# Altium PCB PCB1.PcbDoc
Units mm, origin at the board's own origin, x right, y up, seen from the top; angles counter-clockwise.
Board outline 80.01 x 80.64 mm, 2 copper layers (Top Layer, Bottom Layer); 24 components, 19 nets, 101 pads, 4 vias.
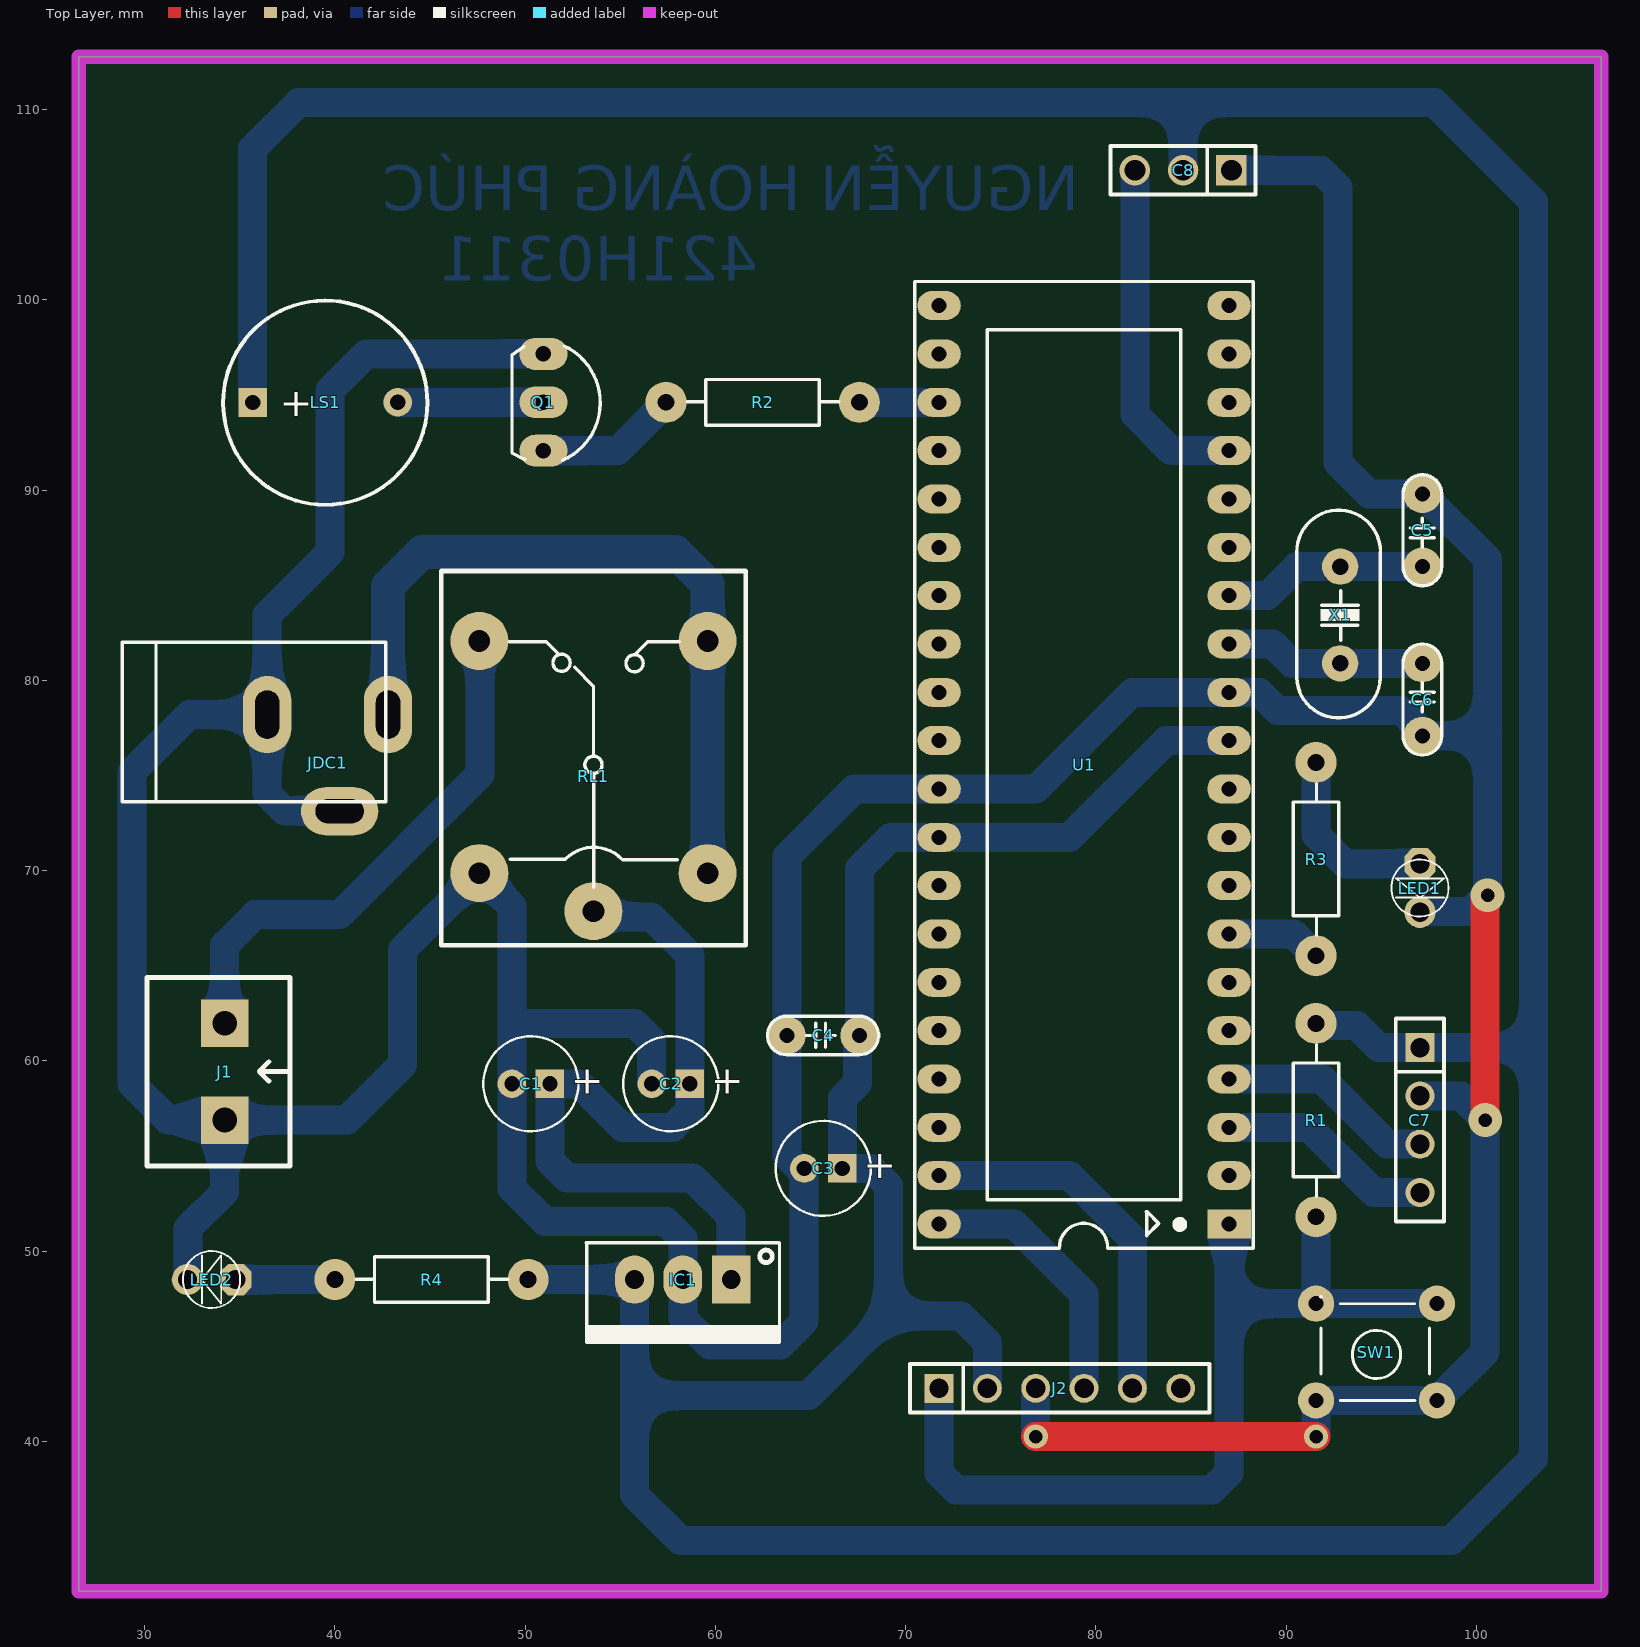
[diagram p0: Top Layer view]
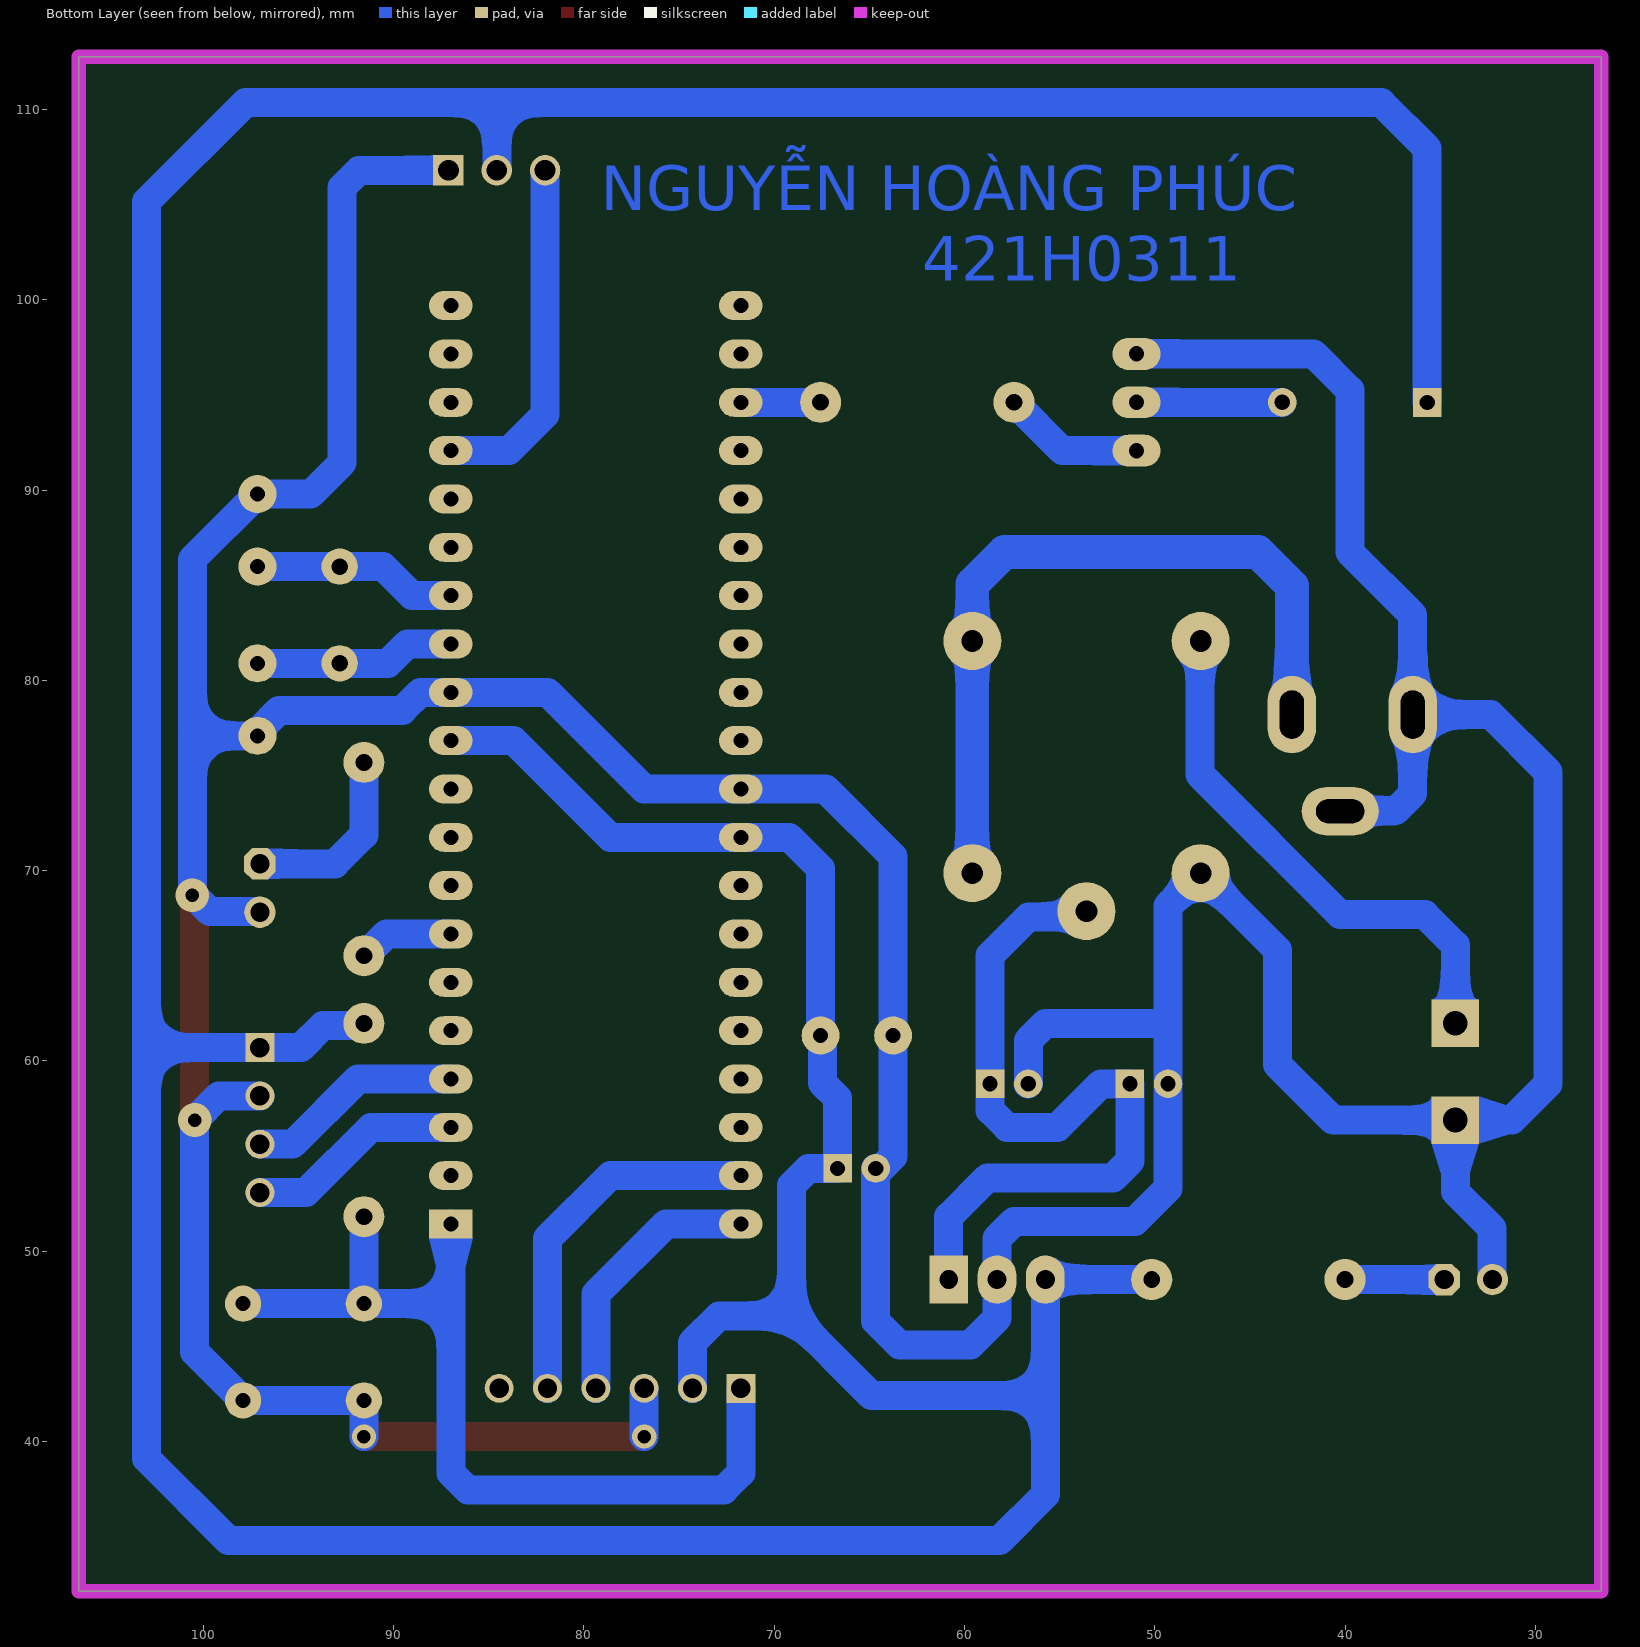
[diagram p1: Bottom Layer view, seen from below]
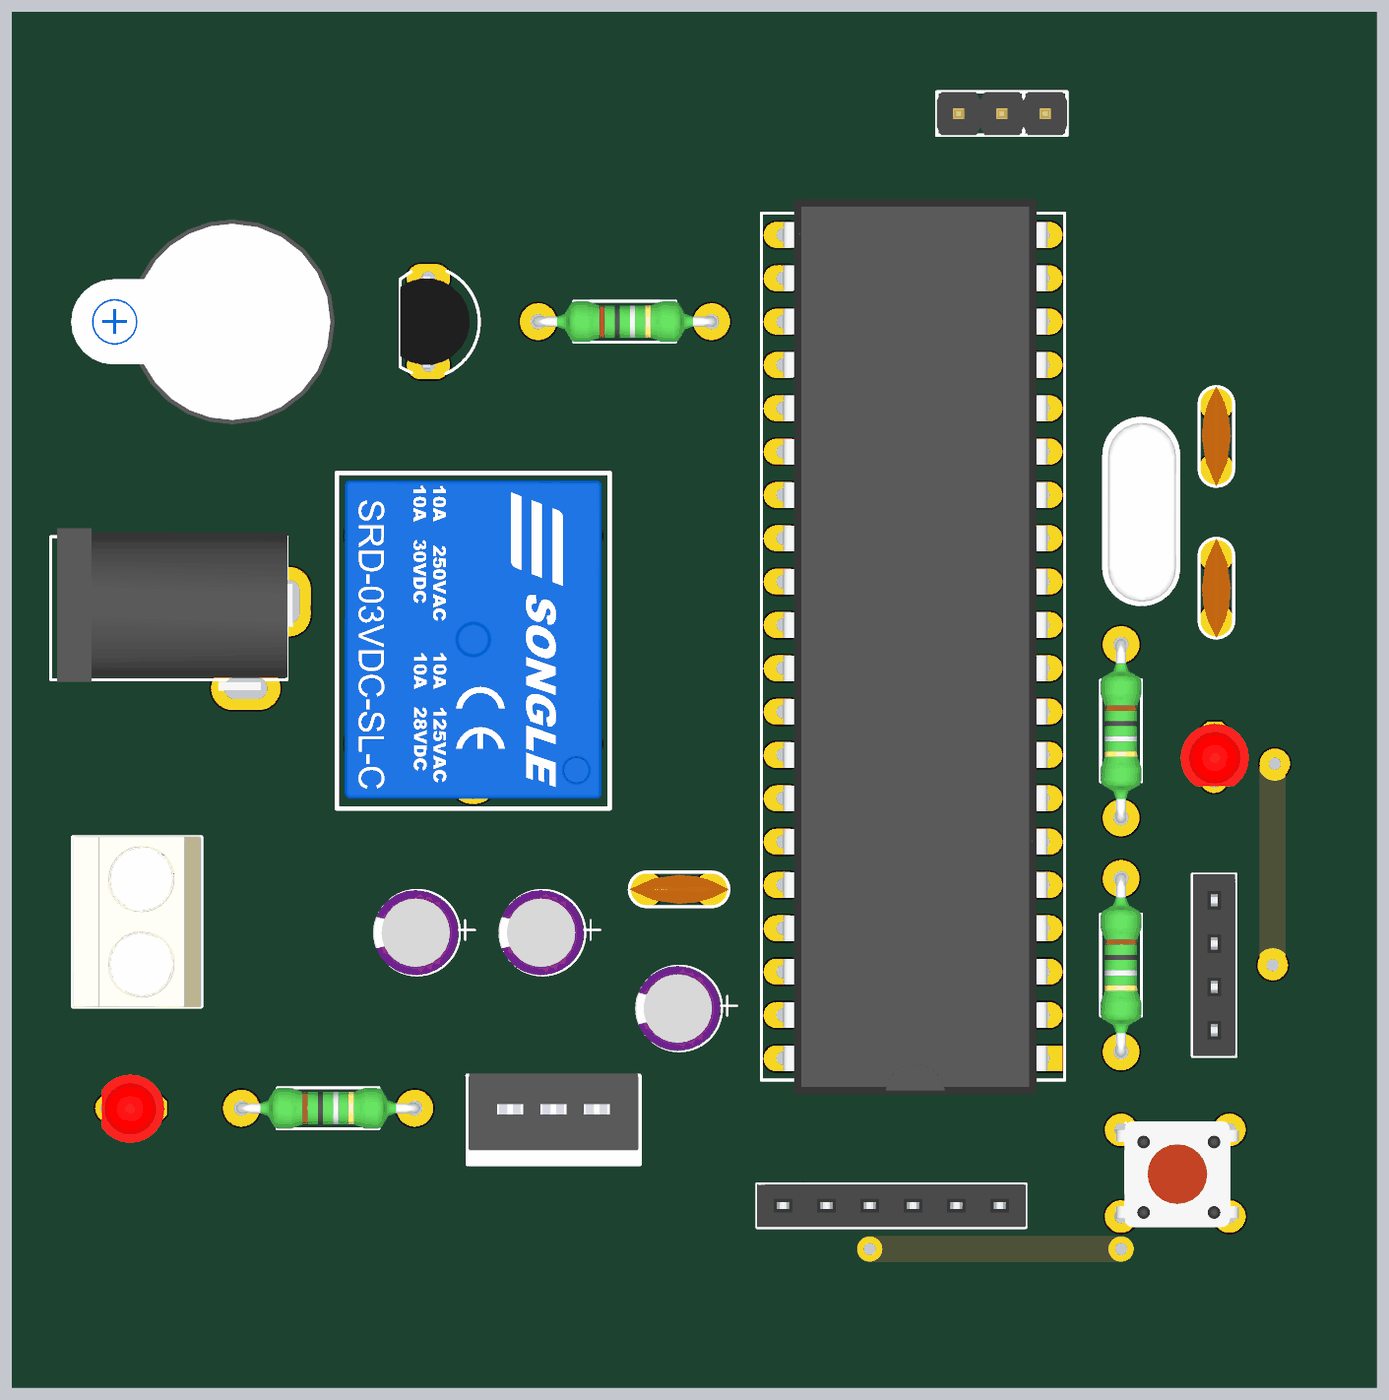
[diagram p2: 3D render of the assembled board from above, using the file's embedded part models]

## Layer stack, top to bottom
Top Solder: solder mask 0.0102, Solder Resist, Dk 3.5
Top Layer: signal copper 0.0356
Dielectric 1: dielectric 0.32, FR-4, Dk 4.8
Bottom Layer: signal copper 0.0356
Bottom Solder: solder mask 0.0102, Solder Resist, Dk 3.5

## Board outline
26.543,32.131 26.543,112.776 106.553,112.776 106.553,32.131

## Design rules (kind name [scope] priority, off if disabled: settings)
Clearance [All] p1: gap=0.762 ignorepadtopadclearanceinfootprint=FALSE
PolygonConnect [All] p1: connectstyle=Relief reliefconductorwidth=0.254 reliefentries=4 polygonreliefangle="90 Angle" airgapwidth=0.254
RoutingVias [All] p1: holewidth=0.711 width=1.27 viastyle="Through Hole" minholewidth=0.711 minwidth=1.27 maxholewidth=0.711 maxwidth=1.27
SolderMaskExpansion [All] p1: expansion=0.102 istentingtop=FALSE
SupplyNets "Schematic Supply Nets_1" [InNet('+5')] p1: voltage=0.000
SupplyNets "Schematic Supply Nets" [InNet('GND')] p2: voltage=0.000
Width [All] p1: maxlimit=1.778 minlimit=0.254 preferedwidth=1.016
30 further rules are at their usual default settings.

## Components (designator, comment, footprint, x,y, rotation, side; value= is the part's Value field where it differs from the comment)
C1 "100uF" CA-ALU-5 50.308,58.801 r180 top value=104
C2 "10uF" CA-ALU-5 57.658,58.801 r180 top value=104
C3 "10uF" CA-ALU-5 65.671,54.356 r180 top value=104
C4 "0.1uF" CN1.5 65.532,61.341 r0 top value=33pF
C5 "20pF" CN1.5 97.155,87.757 r90 top value=33pF
C6 "20pF" CN1.5 97.155,79.121 r270 top value=33pF
C7 "Flame sensor" JP4-C1T 97.028,60.706 r270 top
C8 "Servo" JP3-D1T 87.122,106.807 r180 top
IC1 "LM7805" TO220-123 60.833,48.514 r180 top
J1 "BAT" KF2-5.08 34.214,59.436 r270 top
J2 "PICKIT" JP6-C1T 71.755,42.799 r0 top
JDC1 "Jac DC" DC0 39.624,75.663 r0 top
LED1 "LED" LED-3MM-RED 97.028,70.358 r270 top value="LED 3 ly Single Colour"
LED2 "LED" LED-3MM-RED 34.798,48.514 r180 top value="LED 3 ly Single Colour"
LS1 "Speaker" SPEAKER 35.687,94.602 r0 top
Q1 "C1815" TO92-123 50.965,94.615 r270 top
R1 "10k" RES-1/4W 91.694,57.277 r90 top
R2 "1k" RES-1/4W 62.103,94.742 r180 top
R3 "1k" RES-1/4W 91.694,70.993 r90 top
R4 "Res" RES-1/4W 44.704,48.641 r180 top
RL1 "Relay 10A/12V" "Relay - SRD-03VDC-SL-C" 53.594,75.565 r270 top value="Relay SPDT, 10A, 12V"
SW1 "SW" SW2-DIP 97.917,42.164 r180 top value="SW chip 2 pin"
U1 "PIC16F887A" DIP40/W0.6 86.995,51.435 r90 top
X1 "20MHz" XT2 92.837,83.439 r90 top value=4Mhz

## Footprints (in the part's own frame and the unit in brackets; to place one, negate y for a bottom-side part, rotate by r counter-clockwise, add the part's x,y. Pads: shape width x height; smd on the part's side, far side on the other; paste and mask are expansions set on the pad)
CA-ALU-5 [mm] "Polarized capacitors, Aluminum Electrolytic Capacitors, 2-Leads, Body 5x11x2x0.5"
  rect 1.5x1.5 hole 0.8: 1(-1,0)
  round 1.5 hole 0.8: 2(1,0)
  silkscreen extent -2.5,-2.5 2.5,2.5, body extent -2.41,-2.5 2.59,2.5, height 11
CN1.5 [mm]
  round 2 hole 0.787: 1(-1.778,0) 2(2.032,0)
  silkscreen extent -2.79,-1.02 3.04,1.02, body extent -2.79,-0.85 3.05,0.85, height 5.97
DC0 [mil] "Jac DC input"
  oval 100x160 hole 50 slot 100 at 90 deg: 1(125,100) 2(-125,100)
  oval 160x100 hole 50 slot 100 at 0 deg: 3(25,-100)
  silkscreen extent -425,-80 120,250, body extent -410,-105 134,269, height 434
DIP40/W0.6 [mil] "40 PIN, W 600mil, Pin to pin 100mil"
  rect 60x90 hole 31: 1(0,0)
  oval 60x90 hole 31: 2(100,0) 3(200,0) 4(300,0) 5(400,0) 6(500,0) 7(600,0) 8(700,0) 9(800,0) 10(900,0) 11(1000,0) 12(1100,0) 13(1200,0) 14(1300,0) 15(1400,0) 16(1500,0) 17(1600,0) 18(1700,0) 19(1800,0) 20(1900,0) 21(1900,600) 22(1800,600) 23(1700,600) 24(1600,600) 25(1500,600) 26(1400,600) 27(1300,600) 28(1200,600) 29(1100,600) 30(1000,600) 31(900,600) 32(800,600) 33(700,600) 34(600,600) 35(500,600) 36(400,600) 37(300,600) 38(200,600) 39(100,600) 40(0,600)
  silkscreen extent -50,-50 1950,650, body extent -82,-10 1982,600, height 224
JP3-D1T [mm] "3 pins, 1 row, straight, gold plating"
  rect 1.6x1.6 hole 1.1: 1(0,0)
  round 1.6 hole 1.1: 2(2.54,0) 3(5.08,0)
  silkscreen extent -1.27,-1.27 6.35,1.27, body extent -1.27,-1.27 6.35,1.27, height 8.54
JP4-C1T [mm] "4 row, straight, gold plating"
  rect 1.52x1.52 hole 1.02: 1(0,0)
  round 1.52 hole 1.02: 2(2.54,0) 3(5.08,0) 4(7.62,0)
  silkscreen extent -1.52,-1.27 9.14,1.27, body extent -1.52,-1.25 9.14,1.25, height 8.51
JP6-C1T [mm] "6 row, straight, gold plating"
  rect 1.52x1.52 hole 1.02: 1(0,0)
  round 1.52 hole 1.02: 2(2.54,0) 3(5.08,0) 4(7.62,0) 5(10.16,0) 6(12.7,0)
  silkscreen extent -1.52,-1.27 14.22,1.27, body extent -1.52,-1.25 14.22,1.25, height 8.51
KF2-5.08 [mm]
  rect 2.5x2.5 hole 1.3: 1(-2.54,0) 2(2.54,0)
  silkscreen extent -4.95,-4.08 4.95,3.43, body extent -5,-4.07 5,3.43, height 10
LED-3MM-RED [mil]
  oct 65x65 hole 40: 1(0,0)
  round 65 hole 40: 2(100,0)
  silkscreen extent -9,-59 109,59, body extent -27,-77 117,80, height 181
"Relay - SRD-03VDC-SL-C" [mil] "19.1 x 15.5 x 15.3mm"
  round 120 hole 45: 1(302.94,0) 2(-256.12,-236.22) 3(-256.12,236.22) 4(224.2,236.22) 5(224.2,-236.22)
  silkscreen extent -401,-315 373,315, body extent -385,-297 351,297, height 588
RES-1/4W [mil]
  round 85 hole 35: 1(-215,5) 2(185,5)
  silkscreen extent -173,-42 141,52, body extent -227,-42 197,52, height 95
SPEAKER [mm]
  rect 1.5x1.5 hole 0.8: 1(0,0)
  round 1.5 hole 0.8: 2(7.62,0.013)
  silkscreen extent -1.55,-5.38 9.18,5.36, body extent -5.67,-6 9.77,6, height 3.5
SW2-DIP [mil] "SW button 4pin, 250 x250 mil"
  round 75 hole 31: 1(0,0) 2(0,-200) 3(250,-200) 4(250,0)
  silkscreen extent 15,-215 240,0, body extent -36,-220 276,24, height 276
TO92-123 [mil] "TO-92"
  oval 66x100 hole 32: 1(-100,0) 2(0,0) 3(100,0)
  silkscreen extent -117,-65 120,118, body extent -109,-66 109,95, height 245
TO220-123 [mil] "TO-220 - 1-2-3"
  rect 80x100 hole 39: 1(0,0)
  oval 80x100 hole 39: 2(100,0) 3(200,0)
  silkscreen extent -100,-76 300,130, body extent -95,-80 295,97, height 323
XT2 [mil] "Footpin for Crystal 2 pin"
  round 75 hole 34: 1(-100,0) 2(100,0)
  silkscreen extent -213,-83 217,90, body extent -216,-87 216,90, height 144

## Part data
C1 C2 C3: library part CN-ALU-DIP, "Capacitor (Semiconductor SIM Model)", LatestRevisionDate=17-Jul-2002, LatestRevisionNote="Re-released for DXP Platform.", PackageReference=C1206, Publisher="Altium Limited"
C4 C5 C6: library part CN
C7: library part JP4, "WR-PHD 2.54 mm Angled Socket Header", Manufacturer="W¨¹rth Elektronik eiSos GmbH", partNo=613004143121, ComponentLink1 Description=Manufacturer, ComponentLink1URL=http://www.we-online.com, ComponentLink2 Description=Datasheet, ComponentLink2URL=http://katalog.we-online.de/em/datasheet/6130xx143121.pdf, Created by="Karrer Zheng", Created Date="29 March 2013", NoPins=04
C8: library part JP3, "WR-PHD 2.54 mm Angled Socket Header", Manufacturer="W¨¹rth Elektronik eiSos GmbH", partNo=613003143121, ComponentLink1 Description=Manufacturer, ComponentLink1URL=http://www.we-online.com, ComponentLink2 Description=Datasheet, ComponentLink2URL=http://katalog.we-online.de/em/datasheet/6130xx143121.pdf, Created by="Karrer Zheng", Created Date="29 March 2013", NoPins=03
IC1: library part LM78xx, "Positive Voltage Regulator", ComponentLink1Description="Manufacturer Link", ComponentLink1URL=http://www.st.com/, ComponentLink2Description=Datasheet, ComponentLink2URL=http://www.st.com/stonline/products/literature/ds/2146/l78m05c.pdf, DatasheetVersion=Apr-1994, LatestRevisionDate=17-Jul-2002, LatestRevisionNote="Re-released for DXP Platform.", Note="Tab is connected to pin 3 (GND).", PackageDescription="TO, Thru-Hole, Vertical, Heatsink Mounted; 3 In-Line Leads; Pitch 2.54 mm; Pin sequence 1, 3, 2", PackageReference=ISOWATT220AB, PackageVersion=Jul-1998, Published=24-Aug-2001, Publisher="Altium Limited"
J1: library part KF2, Manufacturer="Würth Elektronik eiSos GmbH", partNo=691103110002, ComponentLink1 Description=Manufacturer, ComponentLink1URL=http://www.we-online.com, ComponentLink2 Description=Datasheet, ComponentLink2URL=http://katalog.we-online.de/em/datasheet/6911031100xx.pdf, Created by="Karrer Zheng", Created Date="29 October 2013", NoPins=2
J2: library part JP6, "WR-PHD 2.54 mm Angled Socket Header", Manufacturer="W¨¹rth Elektronik eiSos GmbH", partNo=613006143121, ComponentLink1 Description=Manufacturer, ComponentLink1URL=http://www.we-online.com, ComponentLink2 Description=Datasheet, ComponentLink2URL=http://katalog.we-online.de/em/datasheet/6130xx143121.pdf, Created by="Karrer Zheng", Created Date="29 March 2013", NoPins=06
JDC1: library part DCIN, "Jac DC input"
LED1 LED2: "LED Single colour Green and Red"
LS1: "Loudspeaker", LatestRevisionDate=17-Jul-2002, LatestRevisionNote="Re-released for DXP Platform.", PackageReference=PIN2, Published=24-Mar-1999, Publisher="Altium Limited"
Q1: library part C458, "NPN 600mW, ECB"
R1 R2 R3: library part Res, "Res", Manufacturer="Generic Components", Class=Passive, Published=08/06/2000, Publisher="Altium Hobart Technology Centre", SubClass=R
R4: Manufacturer="Generic Components", Class=Passive, Published=08/06/2000, Publisher="Altium Hobart Technology Centre", SubClass=R
RL1: library part "Relay 5", "Relay SPDT,10A - 12VDC 5 Pin"
SW1: library part SW2, "Switch button 2 pin"
U1: library part PIC16F887-PU, "Flash-Based, 8-Bit CMOS Microcontroller with nanoWatt Technology, 8K (x14-Bit words) Program Memory, 624 Bytes Data Memory, 35 I/O pins, 40-Pin PDIP, Standard VDD Range, Extended Temperature", Supplier Part Number 1=PIC16F887-E/P-ND, ComponentLink1Description=Datasheet, ComponentLink1URL=http://ww1.microchip.com/downloads/en/DeviceDoc/41291F.pdf, ComponentLink2Description="Packaging Specification", ComponentLink2URL=http://www.microchip.com/stellent/groups/techpub_sg/documents/packagingspec/en012702.pdf, ComponentLink3Description="Microchip.com Home", ComponentLink3URL=http://www.microchip.com/, DatasheetVersion="revF, Apr-2009", LatestRevisionDate=02-Dec-2009, LatestRevisionNote="Updated datasheet to version revF, Apr-2009.", PackageDescription="40-Lead Plastic Dual In-Line (P) - 600 mil Body [PDIP]", PackageReference=PDIP600-P40, PackageVersion="revBB, Aug-2009", Published=29-Jan-2009, Publisher="Altium Limited", Supplier 1=Digi-Key, Supplier 2=Farnell, Supplier Part Number 2=1703423
X1: library part XT2, "Crystal, 32.768 KHz, -40 to 85 degC, 3.2 x 1.5 x 0.9 mm SMD"

## Via types
v1: diameter 1.27, hole 0.711, Top Layer to Bottom Layer, 2 vias
v2: diameter 1.778, hole 0.711, Top Layer to Bottom Layer, 2 vias

## Nets (pads, with @x,y where several pads share a name; then routed paths per layer and width w, separated by ;. In a path a pad name is that pad's centre, name@x,y a point inside that pad or via, vN(x,y) a via of type N, cw(c..) or ccw(c..) an arc to the next point about the centre after c; other vN are vias at no path point)
+5: C3.1 C4.2 C7.1 C8.2 IC1.3 J2.2 LS1.1 R1.2 R4.1 U1.11 U1.32 | length 303.5
  Bottom Layer w1.524: LS1.1 35.687,107.95 38.1,110.363 84.582,110.363 ; R4.1 IC1.3 55.753,42.418 ; J2.2 74.295,45.212 72.898,46.609 69.088,46.609 ; C8.2@84.582,106.828 84.582,110.363 ; U1.11 83.693,76.835 78.613,71.755 U1.32 69.215,71.755 67.564,70.104 C4.2 67.473,61.25 67.473,58.845 66.671,58.043 C3.1 68.195,54.356 69.088,53.463 69.088,46.609 ; R1.2 91.689,61.854 93.721,61.854 94.869,60.706 C7.1 102.997,60.706 ; 55.753,42.418 55.753,37.211 58.166,34.798 98.679,34.798 102.997,39.116 102.997,60.706 ; 55.753,42.418 64.897,42.418 69.088,46.609 ; 84.582,110.363 97.79,110.363 102.997,105.156 102.997,60.706
+12: C1.1 C2.1 IC1.1 RL1.1 | length 40.9
  Bottom Layer w1.524: RL1.1 53.886,67.579 56.627,67.579 58.658,65.548 C2.1 58.658,57.408 57.765,56.515 55.118,56.515 52.832,58.801 C1.1 51.308,54.741 52.201,53.848 58.801,53.848 60.833,51.816 IC1.1
+12_ADAP: JDC1.1 RL1.3 RL1.4 | length 40.2
  Bottom Layer w1.778: JDC1.1 42.799,84.963 44.577,86.741 57.912,86.741 59.594,85.059 RL1.4
+12_BAT: J1.1 RL1.2 | length 27.9
  Bottom Layer w1.524: J1.1 34.214,66.091 35.814,67.691 40.259,67.691 47.625,75.057 RL1.2@47.625,81.752
Analog_0: C7.4 U1.3 | length 11.5
  Bottom Layer w1.524: U1.3 91.186,56.515 94.615,53.086 C7.4
Buzzer: R2.1 U1.23 | length 4.2
  Bottom Layer w1.524: R2.1 U1.23
Digital_0: C7.3 U1.4 | length 11.5
  Bottom Layer w1.524: U1.4 91.879,59.055 95.308,55.626 C7.3
GND: C1.2 C2.2 C3.2 C4.1 C5.2 C6.2 C7.2 C8.1 IC1.2 J1.2 J2.3 JDC1.2 JDC1.3 LED1.2 LED2.2 Q1.1 RL1.5 SW1.1 SW1.4 U1.12 U1.31 | length 326.3
  Top Layer w1.524: v1(76.835,40.259) v1(91.567,40.259) ; v2(100.457,56.896) 100.457,68.511 100.584,68.638 v2(100.584,68.707)
  Bottom Layer w1.524: LED2.2@32.258,48.641 32.282,48.665 32.282,51.205 34.214,53.137 J1.2 ; JDC1.3@41.5,73.152 37.342,73.152 36.449,74.045 JDC1.2 ; Q1.1 41.656,97.155 39.751,95.25 39.751,86.741 36.449,83.439 JDC1.2 ; C2.2 56.642,58.817 56.642,61.083 55.749,61.976 49.308,61.976 ; v1(76.835,40.259) J2.3 ; C8.1 91.817,106.807 92.71,105.914 92.71,91.44 94.361,89.789 C5.2 100.584,86.36 100.584,77.089 ; v1(91.567,40.259) SW1.4 SW1.1 100.457,44.704 v2(100.457,56.896) 99.187,58.166 C7.2 ; LED1.2 97.052,67.842 99.651,67.842 100.515,68.707 v2(100.584,68.707) 100.584,77.089 ; J1.2 40.64,56.896 43.561,59.817 43.561,65.837 RL1.5 49.308,68.156 49.308,61.976 ; J1.2 31.242,56.896 29.337,58.801 29.337,75.184 32.356,78.203 JDC1.2 ; 49.308,61.976 C1.2 49.308,53.308 51.054,51.562 57.4,51.562 58.293,50.669 IC1.2 58.293,46.482 59.69,45.085 63.428,45.085 64.671,46.327 C3.2 64.385,54.356 63.754,54.987 C4.1 63.754,70.739 67.31,74.295 U1.31 76.835,74.295 81.915,79.375 U1.12 88.588,79.375 89.541,78.423 96.024,78.423 97.064,77.383 97.064,77.18 C6.2 100.584,77.089
NetLED1_1: LED1.1 R3.2 | length 9.9
  Bottom Layer w1.524: R3.2 91.567,71.882 93.091,70.358 LED1.1
NetLED2_1: LED2.1 R4.2 | length 5.2
  Bottom Layer w1.524: LED2.1 R4.2
NetLS1_2: LS1.2 Q1.2 | length 7.7
  Bottom Layer w1.524: LS1.2 Q1.2
NetQ1_3: Q1.3 R2.2 | length 7.5
  Bottom Layer w1.524: Q1.3 54.864,92.075 R2.2
PGC: J2.5 U1.39 | length 19.4
  Bottom Layer w1.524: U1.39 78.613,53.975 81.915,50.673 J2.5
PGD: J2.4 U1.40 | length 14.1
  Bottom Layer w1.524: U1.40 75.692,51.435 79.375,47.752 J2.4
PWM: C8.3 U1.17 | length 18.6
  Bottom Layer w1.524: C8.3 82.042,93.98 83.947,92.075 U1.17
RST: J2.1 R1.1 SW1.2 SW1.3 U1.1 | length 48.9
  Bottom Layer w1.524: J2.1 71.755,38.358 72.648,37.465 86.102,37.465 86.995,38.358 86.995,47.244 ; U1.1 86.995,47.244 ; R1.1@91.517,51.694 91.567,51.644 SW1.3 ; SW1.2 SW1.3 ; 86.995,47.244 SW1.3
WARNING_LED: R3.1 U1.7 | length 5
  Bottom Layer w1.524: U1.7 90.381,66.675 91.524,65.532 R3.1
XTAL1: C5.1 U1.14 X1.2 | length 10.8
  Bottom Layer w1.524: U1.14 89.027,84.455 90.551,85.979 X1.2 C5.1
XTAL2: C6.1 U1.13 X1.1 | length 10.6
  Bottom Layer w1.524: U1.13 89.281,81.915 90.297,80.899 X1.1 C6.1
pads on no net: J2.6 U1.2 U1.5 U1.6 U1.8 U1.9 U1.10 U1.15 U1.16 U1.18 U1.19 U1.20 U1.21 U1.22 U1.24 U1.25 U1.26 U1.27 U1.28 U1.29 U1.30 U1.33 U1.34 U1.35 U1.36 U1.37 U1.38

## Keep-outs
Keep-Out Layer:
  the board outline again, w0.762

## Other copper
Bottom Layer:
  text "NGUYỄN HOÀNG PHÚC" at 79.121,103.934 h4
  text "421H0311" at 62.23,100.251 h4

## Text inside footprints (layer, text, board x,y; h text height)
C1: Top Overlay "+" at 54.133,59.538 h1.5 r180
C2: Top Overlay "+" at 61.483,59.538 h1.5 r180
C3: Top Overlay "+" at 69.496,55.093 h1.5 r180
LS1: Top Overlay "+" at 37.097,93.891 h1.52